# EAGLE board PCB2 (EAGLE 8.0.0)
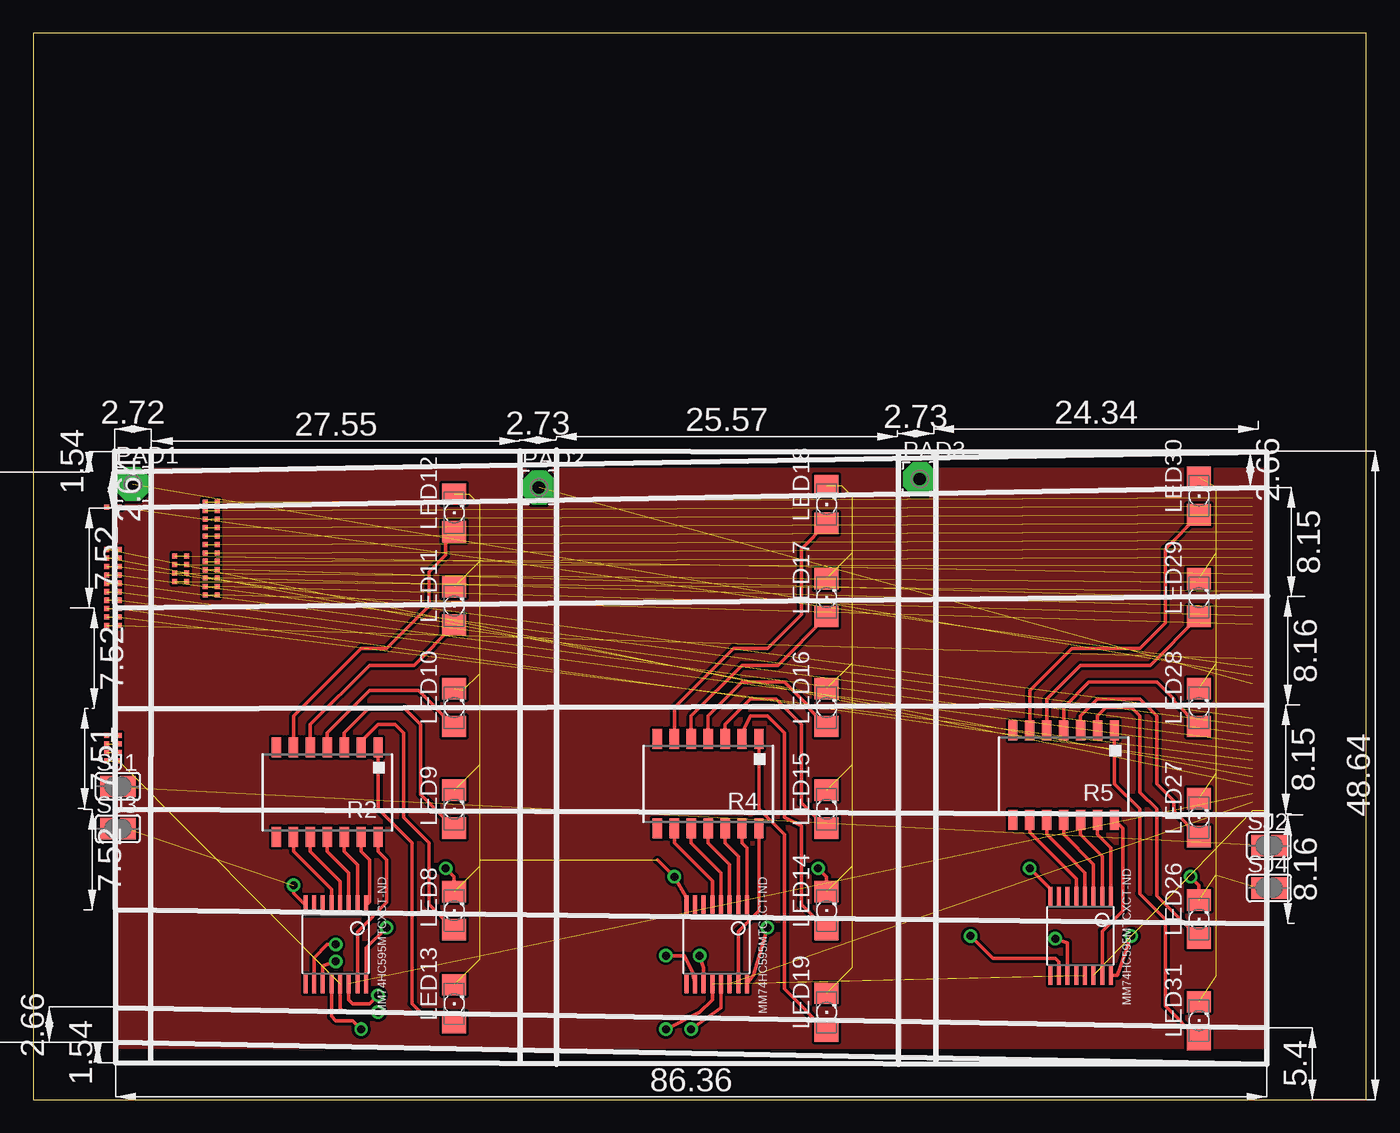
[diagram p0: board, top side]
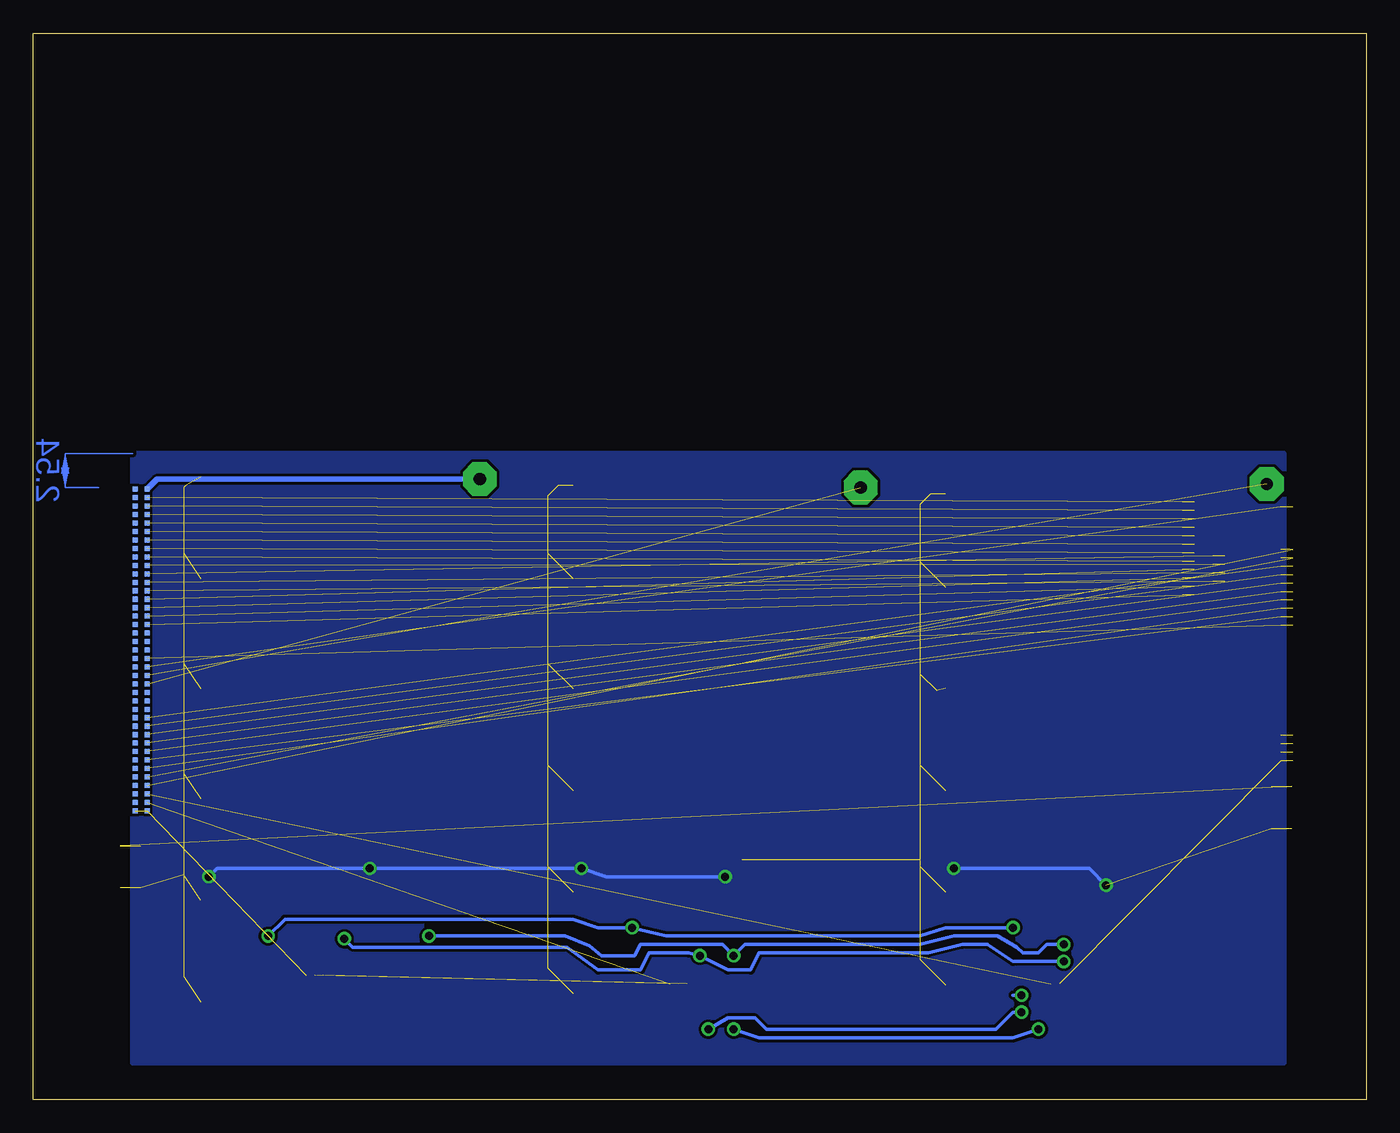
[diagram p1: board, bottom side, seen from below]

Size 100 x 80 mm. Coordinates in mm from the lower left corner, seen from the top.
Outline: 0,0 100,0 100,80 0,80 0,0
Copper layers (1*16): Top 0.035mm / dielectric 1.5mm / Bottom 0.035mm
Design rules "default": minimum track width 10mil, minimum drill 24mil, track to track 8mil, track to pad 8mil, pad to pad 8mil, via to via 8mil, smd to smd 8mil, copper to edge 40mil, drill to drill 8mil, minimum pad ring 10mil, minimum via ring 8mil, stop-mask expansion 4mil, vias tented up to drill 0mil, thermal gap 10mil

## Footprints (pad centres in the part's own frame; a part is rotated, then mirrored left to right if it is on the bottom)
2,8 = hole 2.8: 0,0
1206 = smd 1.6 x 1.803: A -1.422,0; C 1.422,0
2,54/0,9 = drill 0.914 pad 2.54 octagon: 1 0,0
4814P = smd 0.7 x 1.5: 1 -3.81,-3.346; 2 -2.54,-3.346; 3 -1.27,-3.346; 4 0,-3.346; 5 1.27,-3.346; 6 2.54,-3.346; 7 3.81,-3.346; 8 3.81,3.346; 9 2.54,3.346; 10 1.27,3.346; 11 0,3.346; 12 -1.27,3.346; 13 -2.54,3.346; 14 -3.81,3.346
SJ = smd 1.168 x 1.6: 1 -0.762,0; 2 0.762,0
MM74HC595MTCXCT-ND = smd 0.3 x 1.45: 1 -2.275,-2.95; 2 -1.625,-2.95; 3 -0.975,-2.95; 4 -0.325,-2.95; 5 0.325,-2.95; 6 0.975,-2.95; 7 1.625,-2.95; 8 2.275,-2.95; 9 2.275,2.95; 10 1.625,2.95; 11 0.975,2.95; 12 0.325,2.95; 13 -0.325,2.95; 14 -0.975,2.95; 15 -1.625,2.95; 16 -2.275,2.95
JUMPER = smd 0.381 x 0.381: P$1 -0.454,0; P$2 0.454,0

## Placement (x,y rotation side)
H1  MOUNT-HOLE2.8  [2,8]  -36.83,15.24 0 top  (outside the outline)
H2  MOUNT-HOLE2.8  [2,8]  -44.45,15.24 0 top  (outside the outline)
LED8  [1206]  31.58,14.17 90 top
LED9  [1206]  31.58,21.79 90 top
LED10  [1206]  31.58,29.41 90 top
LED11  [1206]  31.58,37.03 90 top
LED12  [1206]  31.58,44.02 90 top
LED13  [1206]  31.58,7.18 90 top
LED14  [1206]  59.52,14.17 90 top
LED15  [1206]  59.52,21.79 90 top
LED16  [1206]  59.52,29.41 90 top
LED17  [1206]  59.52,37.66 90 top
LED18  [1206]  59.52,44.65 90 top
LED19  [1206]  59.52,6.55 90 top
LED26  [1206]  87.46,13.54 90 top
LED27  [1206]  87.46,21.16 90 top
LED28  [1206]  87.46,29.41 90 top
LED29  [1206]  87.46,37.66 90 top
LED30  [1206]  87.46,45.28 90 top
LED31  [1206]  87.46,5.92 90 top
PAD1  WIREPAD2,54/0,9  [2,54/0,9]  7.45,46.17 0 top
PAD2  WIREPAD2,54/0,9  [2,54/0,9]  37.93,45.92 0 top
PAD3  WIREPAD2,54/0,9  [2,54/0,9]  66.5,46.55 0 top
R2  [4814P]  22.05,23.06 180 top
R4  [4814P]  50.63,23.7 180 top
R5  [4814P]  77.3,24.33 180 top
SJ1  [SJ]  6.35,23.5 0 top
SJ2  [SJ]  92.71,19.05 0 top
SJ3  [SJ]  6.35,20.32 0 top
SJ4  [SJ]  92.71,15.88 0 top
U$1  MM74HC595TSSOP-LD16  [MM74HC595MTCXCT-ND]  22.69,11.63 180 top
U$2  JUMPER  [JUMPER]  91.91,45.79 0 bottom
U$3  MM74HC595TSSOP-LD16  [MM74HC595MTCXCT-ND]  51.27,11.63 180 top
U$4  JUMPER  [JUMPER]  91.91,21.66 0 bottom
U$5  MM74HC595TSSOP-LD16  [MM74HC595MTCXCT-ND]  78.57,12.27 180 top
U$6  JUMPER  [JUMPER]  91.91,45.16 0 bottom
U$7  JUMPER  [JUMPER]  91.91,44.52 0 bottom
U$8  JUMPER  [JUMPER]  91.91,43.89 0 bottom
U$9  JUMPER  [JUMPER]  91.91,43.25 0 bottom
U$10  JUMPER  [JUMPER]  91.91,42.62 0 bottom
U$11  JUMPER  [JUMPER]  91.91,41.98 0 bottom
U$12  JUMPER  [JUMPER]  91.91,41.35 0 bottom
U$13  JUMPER  [JUMPER]  91.91,40.71 0 bottom
U$14  JUMPER  [JUMPER]  91.91,40.08 0 bottom
U$15  JUMPER  [JUMPER]  91.91,39.44 0 bottom
U$16  JUMPER  [JUMPER]  91.91,38.81 0 bottom
U$17  JUMPER  [JUMPER]  91.91,38.17 0 bottom
U$18  JUMPER  [JUMPER]  91.91,37.54 0 bottom
U$19  JUMPER  [JUMPER]  91.91,36.9 0 bottom
U$20  JUMPER  [JUMPER]  91.91,36.27 0 bottom
U$21  JUMPER  [JUMPER]  91.91,35.63 0 bottom
U$22  JUMPER  [JUMPER]  91.91,35 0 bottom
U$23  JUMPER  [JUMPER]  91.91,34.36 0 bottom
U$24  JUMPER  [JUMPER]  91.91,33.73 0 bottom
U$25  JUMPER  [JUMPER]  91.91,33.09 0 bottom
U$26  JUMPER  [JUMPER]  91.91,32.46 0 bottom
U$27  JUMPER  [JUMPER]  91.91,31.82 0 bottom
U$28  JUMPER  [JUMPER]  91.91,31.19 0 bottom
U$29  JUMPER  [JUMPER]  91.91,30.55 0 bottom
U$30  JUMPER  [JUMPER]  91.91,29.92 0 bottom
U$31  JUMPER  [JUMPER]  91.91,29.28 0 bottom
U$32  JUMPER  [JUMPER]  91.91,28.65 0 bottom
U$33  JUMPER  [JUMPER]  91.91,28.01 0 bottom
U$34  JUMPER  [JUMPER]  91.91,27.38 0 bottom
U$35  JUMPER  [JUMPER]  91.91,26.74 0 bottom
U$36  JUMPER  [JUMPER]  91.91,26.11 0 bottom
U$37  JUMPER  [JUMPER]  91.91,25.47 0 bottom
U$38  JUMPER  [JUMPER]  91.91,24.84 0 bottom
U$39  JUMPER  [JUMPER]  91.91,24.2 0 bottom
U$40  JUMPER  [JUMPER]  91.91,23.57 0 bottom
U$41  JUMPER  [JUMPER]  91.91,22.93 0 bottom
U$42  JUMPER  [JUMPER]  91.91,22.3 0 bottom
U$43  JUMPER  [JUMPER]  5.97,44.45 0 top
U$44  JUMPER  [JUMPER]  11.05,40.77 0 top
U$45  JUMPER  [JUMPER]  11.05,40.13 0 top
U$46  JUMPER  [JUMPER]  11.05,39.5 0 top
U$47  JUMPER  [JUMPER]  11.05,38.86 0 top
U$48  JUMPER  [JUMPER]  5.97,41.27 0 top
U$49  JUMPER  [JUMPER]  5.97,40.64 0 top
U$50  JUMPER  [JUMPER]  5.97,40.01 0 top
U$51  JUMPER  [JUMPER]  5.97,39.37 0 top
U$52  JUMPER  [JUMPER]  5.97,38.73 0 top
U$53  JUMPER  [JUMPER]  5.97,38.1 0 top
U$54  JUMPER  [JUMPER]  5.97,37.47 0 top
U$55  JUMPER  [JUMPER]  5.97,36.83 0 top
U$56  JUMPER  [JUMPER]  5.97,36.2 0 top
U$57  JUMPER  [JUMPER]  5.97,35.56 0 top
U$58  JUMPER  [JUMPER]  13.34,44.83 0 top
U$59  JUMPER  [JUMPER]  13.34,44.2 0 top
U$60  JUMPER  [JUMPER]  13.34,43.56 0 top
U$61  JUMPER  [JUMPER]  13.34,42.93 0 top
U$62  JUMPER  [JUMPER]  13.34,42.29 0 top
U$63  JUMPER  [JUMPER]  13.34,41.66 0 top
U$64  JUMPER  [JUMPER]  13.34,41.02 0 top
U$65  JUMPER  [JUMPER]  13.34,40.39 0 top
U$66  JUMPER  [JUMPER]  13.34,39.75 0 top
U$67  JUMPER  [JUMPER]  13.34,39.12 0 top
U$68  JUMPER  [JUMPER]  13.34,38.48 0 top
U$69  JUMPER  [JUMPER]  13.34,37.85 0 top
U$70  JUMPER  [JUMPER]  5.97,27.3 0 top
U$71  JUMPER  [JUMPER]  5.97,26.67 0 top
U$72  JUMPER  [JUMPER]  5.97,26.04 0 top
U$73  JUMPER  [JUMPER]  5.97,25.4 0 top

## Library data of the parts
H1 H2 = holes
LED8-LED19 LED26-LED31 = led
PAD1-PAD3 = wirepad
R2 R4 R5 = resistor-bourns; MF: BOURNS, INC.; MPN: 4814P-T01-104LF; OC_FARNELL: 9357386; OC_NEWARK: 33K0526
SJ1-SJ4 = jumper
U$1-U$73 = ECE477_Guitutar

## Nets
EAN: U$37.P$2 U$56.P$1 U$56.P$2
FRET1: U$25.P$2 U$57.P$1 U$57.P$2
FRET2: U$26.P$2 U$43.P$1 U$43.P$2
FRET3: PAD1.1 U$27.P$2
FRET4: PAD2.1 U$28.P$2
FRET5: PAD3.1 U$2.P$2
G: U$1.13 U$3.13 U$5.13 U$73.P$1 U$73.P$2
GND: LED8.C LED9.C LED10.C LED11.C LED12.C LED13.C LED14.C LED15.C LED16.C LED17.C LED18.C LED19.C LED26.C LED27.C LED28.C LED29.C LED30.C LED31.C SJ3.1 SJ3.2 SJ4.1 SJ4.2 U$1.8 U$3.8 U$5.8
LED_SER1: U$18.P$2 U$66.P$1 U$66.P$2
LED_SER2: U$19.P$2 U$67.P$1 U$67.P$2
LED_SER3: U$20.P$2 U$68.P$1 U$68.P$2
LED_SER4: U$21.P$2 U$69.P$1 U$69.P$2
LED_SER5: U$1.14 U$41.P$2
LED_SER6: U$3.14 U$42.P$2
LED_SER7: U$4.P$1 U$4.P$2 U$5.14
N$14: U$71.P$1 U$71.P$2
N$19: R2.13 U$1.1
N$20: R2.12 U$1.2
N$21: R2.11 U$1.3
N$22: R2.10 U$1.4
N$23: R2.9 U$1.5
N$24: R2.14 U$1.15
N$25: LED13.A R2.1
N$26: LED8.A R2.2
N$27: LED9.A R2.3
N$28: LED10.A R2.4
N$29: LED11.A R2.5
N$30: LED12.A R2.6
N$35: R4.13 U$3.1
N$36: R4.12 U$3.2
N$37: R4.11 U$3.3
N$38: R4.10 U$3.4
N$39: R4.9 U$3.5
N$40: R4.14 U$3.15
N$41: LED19.A R4.1
N$43: LED14.A R4.2
N$44: LED15.A R4.3
N$46: LED16.A R4.4
N$47: LED17.A R4.5
N$48: U$70.P$1 U$70.P$2
N$49: LED18.A R4.6
N$51: U$72.P$1 U$72.P$2
N$60: R5.13 U$5.1
N$61: R5.12 U$5.2
N$62: R5.11 U$5.3
N$63: R5.10 U$5.4
N$64: R5.9 U$5.5
N$66: R5.14 U$5.15
N$67: LED31.A R5.1
N$68: LED26.A R5.2
N$69: LED27.A R5.3
N$70: LED28.A R5.4
N$71: LED29.A R5.5
N$72: LED30.A R5.6
P0_0: U$34.P$2 U$52.P$1 U$52.P$2
P0_4: U$16.P$2 U$46.P$1 U$46.P$2
P0_5: U$33.P$2 U$51.P$1 U$51.P$2
P1_2: U$40.P$2 U$48.P$1 U$48.P$2
P1_3: U$39.P$2 U$49.P$1 U$49.P$2
P1_5: U$17.P$2 U$47.P$1 U$47.P$2
P1_7: U$32.P$2 U$50.P$1 U$50.P$2
P2_0: U$35.P$2 U$53.P$1 U$53.P$2
P2_4: U$36.P$2 U$54.P$1 U$54.P$2
P3_1: U$8.P$2 U$60.P$1 U$60.P$2
P3_2: U$9.P$2 U$61.P$1 U$61.P$2
P3_3: U$10.P$2 U$62.P$1 U$62.P$2
P3_4: U$11.P$2 U$63.P$1 U$63.P$2
P3_6: U$12.P$2 U$64.P$1 U$64.P$2
P3_7: U$13.P$2 U$65.P$1 U$65.P$2
RCK: U$1.12 U$3.12 U$5.12
RST_N: U$38.P$2 U$55.P$1 U$55.P$2
RXD: U$6.P$2 U$58.P$1 U$58.P$2
SCK: U$1.11 U$3.11 U$5.11
SCLR: U$1.10 U$3.10 U$5.10
STRING1: U$22.P$2
STRING2: U$23.P$2
STRING3: U$24.P$2
STRING4: U$29.P$2
STRING5: U$30.P$2
STRING6: U$31.P$2
SW_BTN: U$15.P$2 U$44.P$1 U$44.P$2
TXD: U$7.P$2 U$59.P$1 U$59.P$2
VCC: U$1.16 U$3.16 U$5.16
VDD: SJ1.1 SJ1.2 SJ2.1 SJ2.2
WAKEUP: U$14.P$2 U$45.P$1 U$45.P$2

## Tracks (layer width: path | path; a pad name or v marks a point on that pad's centre or on a via)
EAN  (2 unrouted)
FRET1  (2 unrouted)
FRET2  (2 unrouted)
FRET3  (1 unrouted)
FRET4  (1 unrouted)
FRET5
  Bottom 0.406: U$2.P$2 90.69,46.55 PAD3.1
G  (via drill 0.6)  (3 unrouted)
  Top 0.254: U$1.13 23.02,6.86 23.32,6.55 v25.86,6.55 | v49.36,5.28 51.59,6.88 U$3.13
  Bottom 0.254: v25.86,6.55 26.5,6.55 27.77,5.28 45.01,5.28 45.84,6.11 47.89,6.11 v49.36,5.28
GND  (via drill 0.6)  (43 unrouted)
  Top 0.254: U$1.8 19.52,15.48 v19.52,16.07 | v30.95,17.34 31.58,16.71 LED8.C | U$3.8 48.95,15.21 v48.09,16.71 46.82,17.98 | v58.88,17.34 59.52,16.71 LED14.C | v86.83,16.71 87.46,16.07 LED26.C | U$5.8 76.3,15.81 v74.76,17.34
  Bottom 0.254: v19.52,16.07 20.79,17.34 v30.95,17.34 | v48.09,16.71 56.98,16.71 v58.88,17.34 v74.76,17.34 86.19,17.34 v86.83,16.71
  pour Bottom: 6.18,48.46 92.54,48.46 92.54,2.74 6.18,2.74
LED_SER1  (2 unrouted)
LED_SER2  (2 unrouted)
LED_SER3  (2 unrouted)
LED_SER4  (2 unrouted)
LED_SER5  (via drill 0.6)  (1 unrouted)
  Top 0.254: U$1.14 23.66,7.48 23.96,7.18 25.23,7.18 v25.86,7.82
  Bottom 0.254: v25.86,7.82 26.5,7.82
LED_SER6  (1 unrouted)
LED_SER7  (2 unrouted)
N$1
  pour Top: 6.18,47.19 92.54,47.19 92.54,4.01 6.18,4.01
N$14  (1 unrouted)
N$19
  Top 0.254: R2.13 24.59,18.61 25.23,17.98 25.23,14.85 U$1.1
N$20
  Top 0.254: R2.12 23.32,18.61 24.32,17.62 U$1.2
N$21
  Top 0.254: R2.11 22.05,18.61 23.66,17 U$1.3
N$22
  Top 0.254: R2.10 20.79,18.61 23.02,16.39 U$1.4
N$23
  Top 0.254: R2.9 19.52,18.61 22.36,15.77 U$1.5
N$24
  Top 0.254: R2.14 25.86,18.61 26.5,17.98 26.5,14.8 25.45,13.75 25.45,13.72 24.32,12.59 U$1.15
N$25
  Top 0.254: LED13.A 30.79,6.55 29.04,6.55 28.41,7.18 28.41,19.25 25.86,21.79 R2.1
N$26
  Top 0.254: LED8.A 29.68,14.65 29.68,19.25 27.77,21.16 27.77,27.5 27.14,28.14 25.86,28.14 24.59,26.87 R2.2
N$27
  Top 0.254: R2.3 23.32,27.5 25.23,29.41 27.77,29.41 29.04,28.14 29.04,22.91 LED9.A
N$28
  Top 0.254: R2.4 22.05,27.5 25.23,30.68 28.89,30.68 LED10.A
N$29
  Top 0.254: R2.5 20.79,28.14 25.23,32.59 28.56,32.59 LED11.A
N$30
  Top 0.254: LED12.A 30.95,41.96 30.95,40.84 29.68,39.57 29.68,37.03 26.5,33.85 24.59,33.85 19.52,28.77 R2.6
N$35
  Top 0.254: U$3.1 53.54,18.88 53.17,19.25 R4.13
N$36
  Top 0.254: U$3.2 52.89,18.26 51.9,19.25 R4.12
N$37
  Top 0.254: U$3.3 52.24,17.64 50.63,19.25 R4.11
N$38
  Top 0.254: U$3.4 51.59,17.01 51.44,17.16 51.44,17.17 49.36,19.25 R4.10
N$39
  Top 0.254: U$3.5 50.94,16.4 48.09,19.25 R4.9
N$40
  Top 0.254: R4.14 54.44,14.17 52.89,12.62 U$3.15
N$41
  Top 0.254: R4.1 54.44,21.79 56.34,19.89 56.34,8.3 LED19.A
N$43
  Top 0.254: R4.2 53.17,27.5 53.8,28.77 55.08,28.77 56.34,27.5 56.34,21.16 57.62,20.52 57.62,14.65 LED14.A
N$44
  Top 0.254: R4.3 51.9,28.14 53.8,30.05 55.71,30.05 57.62,28.14 57.62,22.27 LED15.A
N$46
  Top 0.254: R4.4 50.63,28.77 53.17,31.32 56.34,31.32 58.25,29.41 58.25,29.26 LED16.A
N$47
  Top 0.254: R4.5 49.36,28.77 53.17,32.59 55.86,32.59 LED17.A
N$48  (1 unrouted)
N$49
  Top 0.254: R4.6 48.09,29.41 52.53,33.85 55.08,33.85 57.62,36.4 57.62,41.32 LED18.A
N$51  (1 unrouted)
N$60
  Top 0.254: R5.13 79.84,19.89 80.84,18.88 U$5.1
N$61
  Top 0.254: U$5.2 80.19,18.26 78.57,19.89 R5.12
N$62
  Top 0.254: U$5.3 79.55,17.64 77.3,19.89 R5.11
N$63
  Top 0.254: U$5.4 78.89,17.01 78.56,17.34 77.94,17.97 76.03,19.89 R5.10
N$64
  Top 0.254: U$5.5 78.25,16.54 74.76,20.03 R5.9
N$66
  Top 0.254: 80.19,8.73 U$5.15 80.19,12.62 81.75,14.17 81.75,20.35 R5.14
N$67
  Top 0.254: R5.1 81.11,23.7 83.02,21.79 83.02,15.44 84.92,13.54 84.92,7.03 LED31.A
N$68
  Top 0.254: R5.2 79.84,28.77 80.47,29.41 82.38,29.41 83.02,28.77 83.02,23.06 84.28,21.79 84.28,15.29 LED26.A
N$69
  Top 0.254: R5.3 78.57,28.77 79.84,30.05 83.02,30.05 84.28,28.77 84.28,23.7 85.56,22.43 85.56,21.64 LED27.A
N$70
  Top 0.254: R5.4 77.3,29.41 79.2,31.32 84.28,31.32 85.56,30.05 85.56,29.89 LED28.A
N$71
  Top 0.254: R5.5 76.03,30.05 78.57,32.59 83.8,32.59 LED29.A
N$72
  Top 0.254: R5.6 74.76,30.68 77.94,33.85 83.02,33.85 84.92,35.76 84.92,41.32 LED30.A
P0_0  (2 unrouted)
P0_4  (2 unrouted)
P0_5  (2 unrouted)
P1_2  (2 unrouted)
P1_3  (2 unrouted)
P1_5  (2 unrouted)
P1_7  (2 unrouted)
P2_0  (2 unrouted)
P2_4  (2 unrouted)
P3_1  (2 unrouted)
P3_2  (2 unrouted)
P3_3  (2 unrouted)
P3_4  (2 unrouted)
P3_6  (2 unrouted)
P3_7  (2 unrouted)
RCK  (via drill 0.6)  (1 unrouted)
  Top 0.254: U$1.12 22.36,6.24 22.69,5.92 23.96,5.92 v24.59,5.28 | U$3.12 50.94,7.5 49.99,6.55 v47.45,5.28
  Bottom 0.254: v47.45,5.28 45.55,4.64 26.5,4.64 v24.59,5.28
RST_N  (2 unrouted)
RXD  (2 unrouted)
SCK  (via drill 0.6)
  Top 0.254: U$1.11 21.71,10.02 v22.69,10.36 | U$3.11 50.29,9.87 v49.99,10.8 | v76.67,12.07 77.59,11.77 U$5.11
  Bottom 0.254: v22.69,10.36 26.5,10.36 28.41,11.63 30.31,11.63 32.85,10.99 45.55,10.99 46.19,9.72 47.89,9.72 v49.99,10.8 50.83,10.99 53.8,10.99 54.44,9.72 57.62,9.72 59.96,11.43 76.03,11.43 v76.67,12.07
SCLR  (via drill 0.6)
  Top 0.254: U$1.10 21.07,10.64 22.05,11.63 v22.69,11.63 | U$3.10 49.47,9.48 49.47,9.54 48.85,10.8 v47.45,10.8 | v70.31,12.27 71.98,10.6 76.67,10.6 76.94,10.32 U$5.10
  Bottom 0.254: v22.69,11.63 23.96,11.63 24.59,10.99 25.77,10.99 26.21,11.43 27.68,12.27 30.95,12.27 33.48,11.63 46.62,11.63 v47.45,10.8 48.29,11.63 54.44,11.63 54.88,10.8 57.35,10.8 58.28,11.53 60.09,12.27 v70.31,12.27
SW_BTN  (2 unrouted)
TXD  (2 unrouted)
VCC  (via drill 0.6)
  Top 0.254: U$3.16 54.03,9.31 v55.08,12.9 | U$5.16 81.33,9.31 v82.38,12.27 | v26.5,12.9 24.96,11.37 U$1.16
  Bottom 0.254: v82.38,12.27 81.11,13.54 59.52,13.54 57.62,12.9 v55.08,12.9 52.53,12.27 33.48,12.27 31.58,12.9 v26.5,12.9
VDD  (3 unrouted)
WAKEUP  (2 unrouted)
(copper drawn outside any net)
  shapes: Bottom area x1